# Altium PCB ARM2toARM3Adapter.pcbdoc
Units mm, origin at the board's own origin, x right, y up, seen from the top; angles counter-clockwise.
Board outline 40.84 x 49.23 mm, 4 copper layers (TopLayer, GND, VCC, BottomLayer), stack 1.659 mm thick; 18 components, 80 nets, 290 pads, 148 vias.
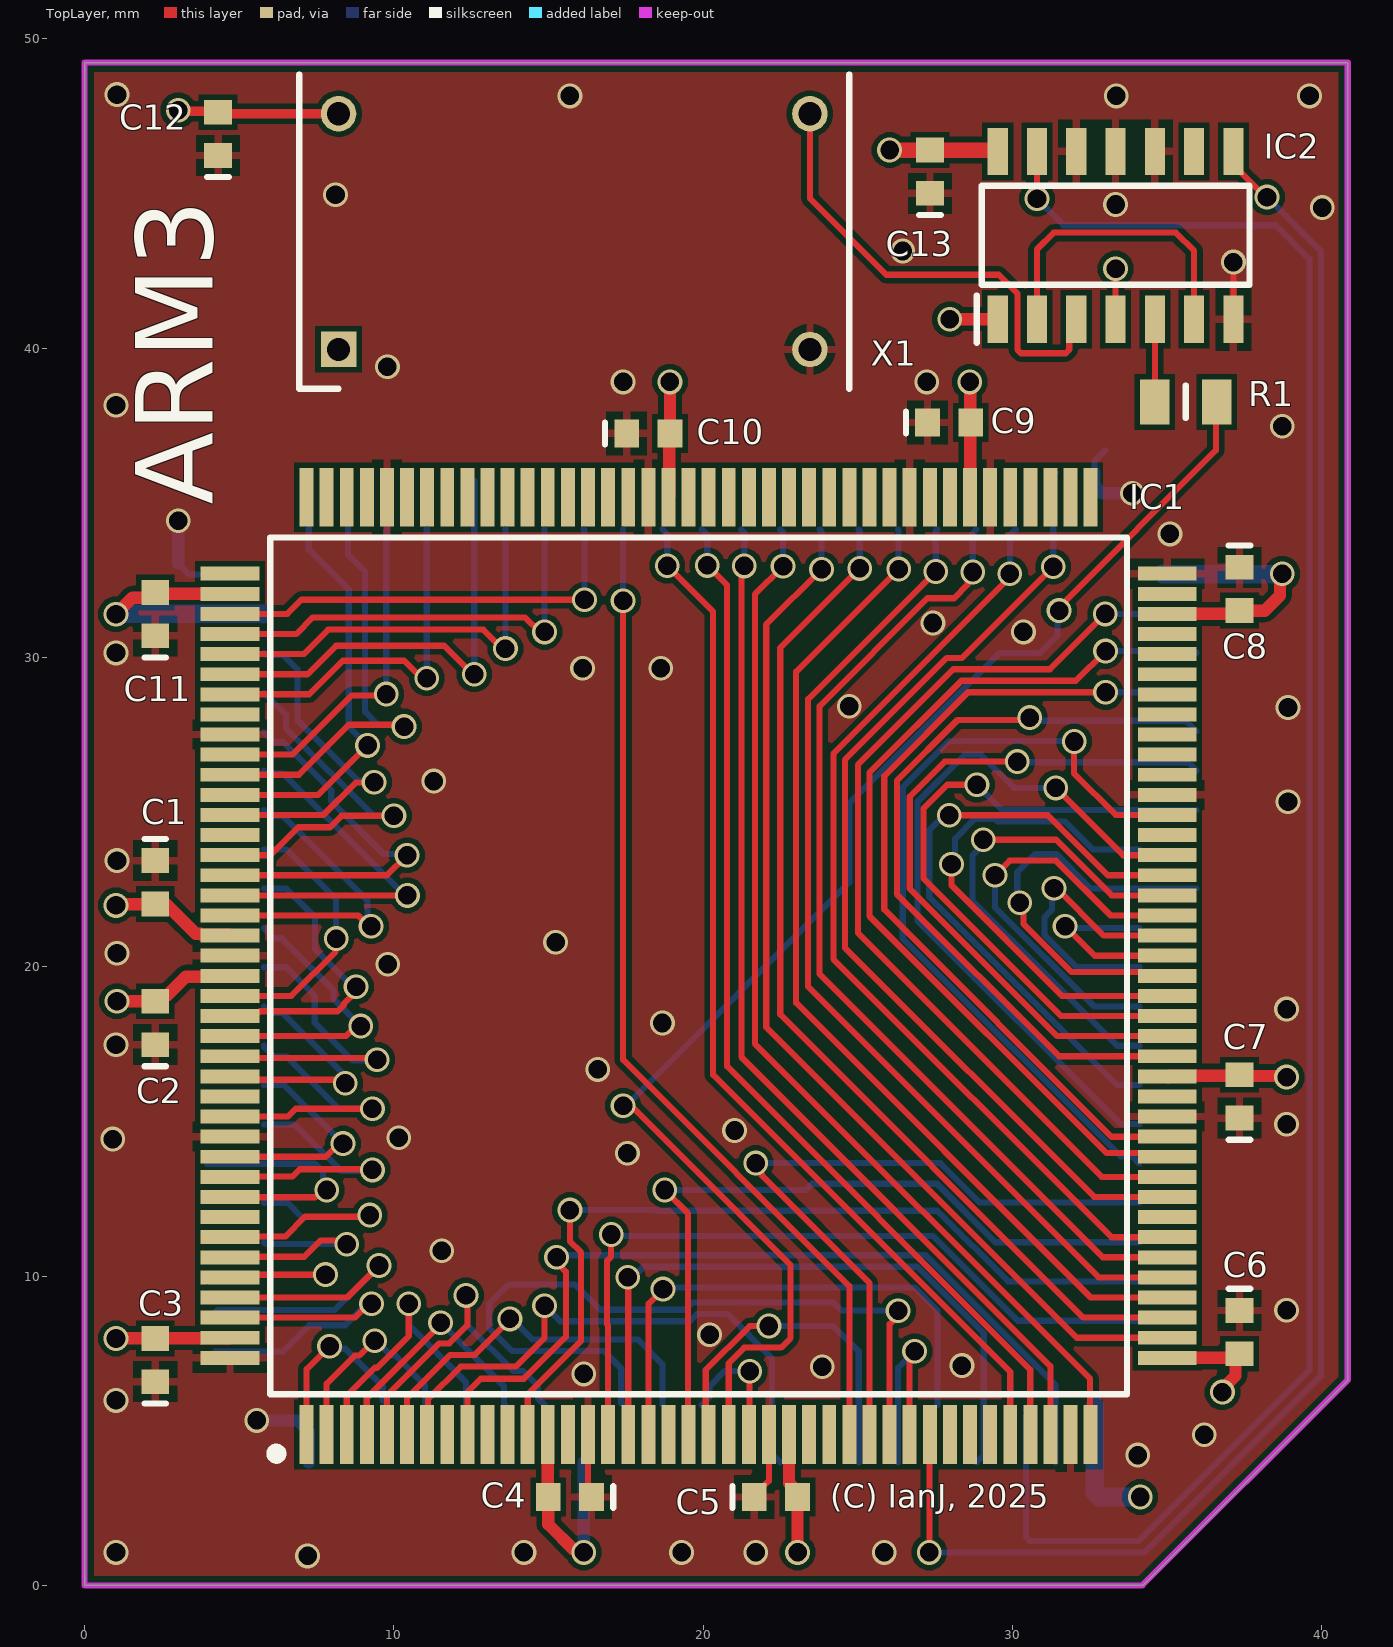
[diagram p0: TopLayer view]
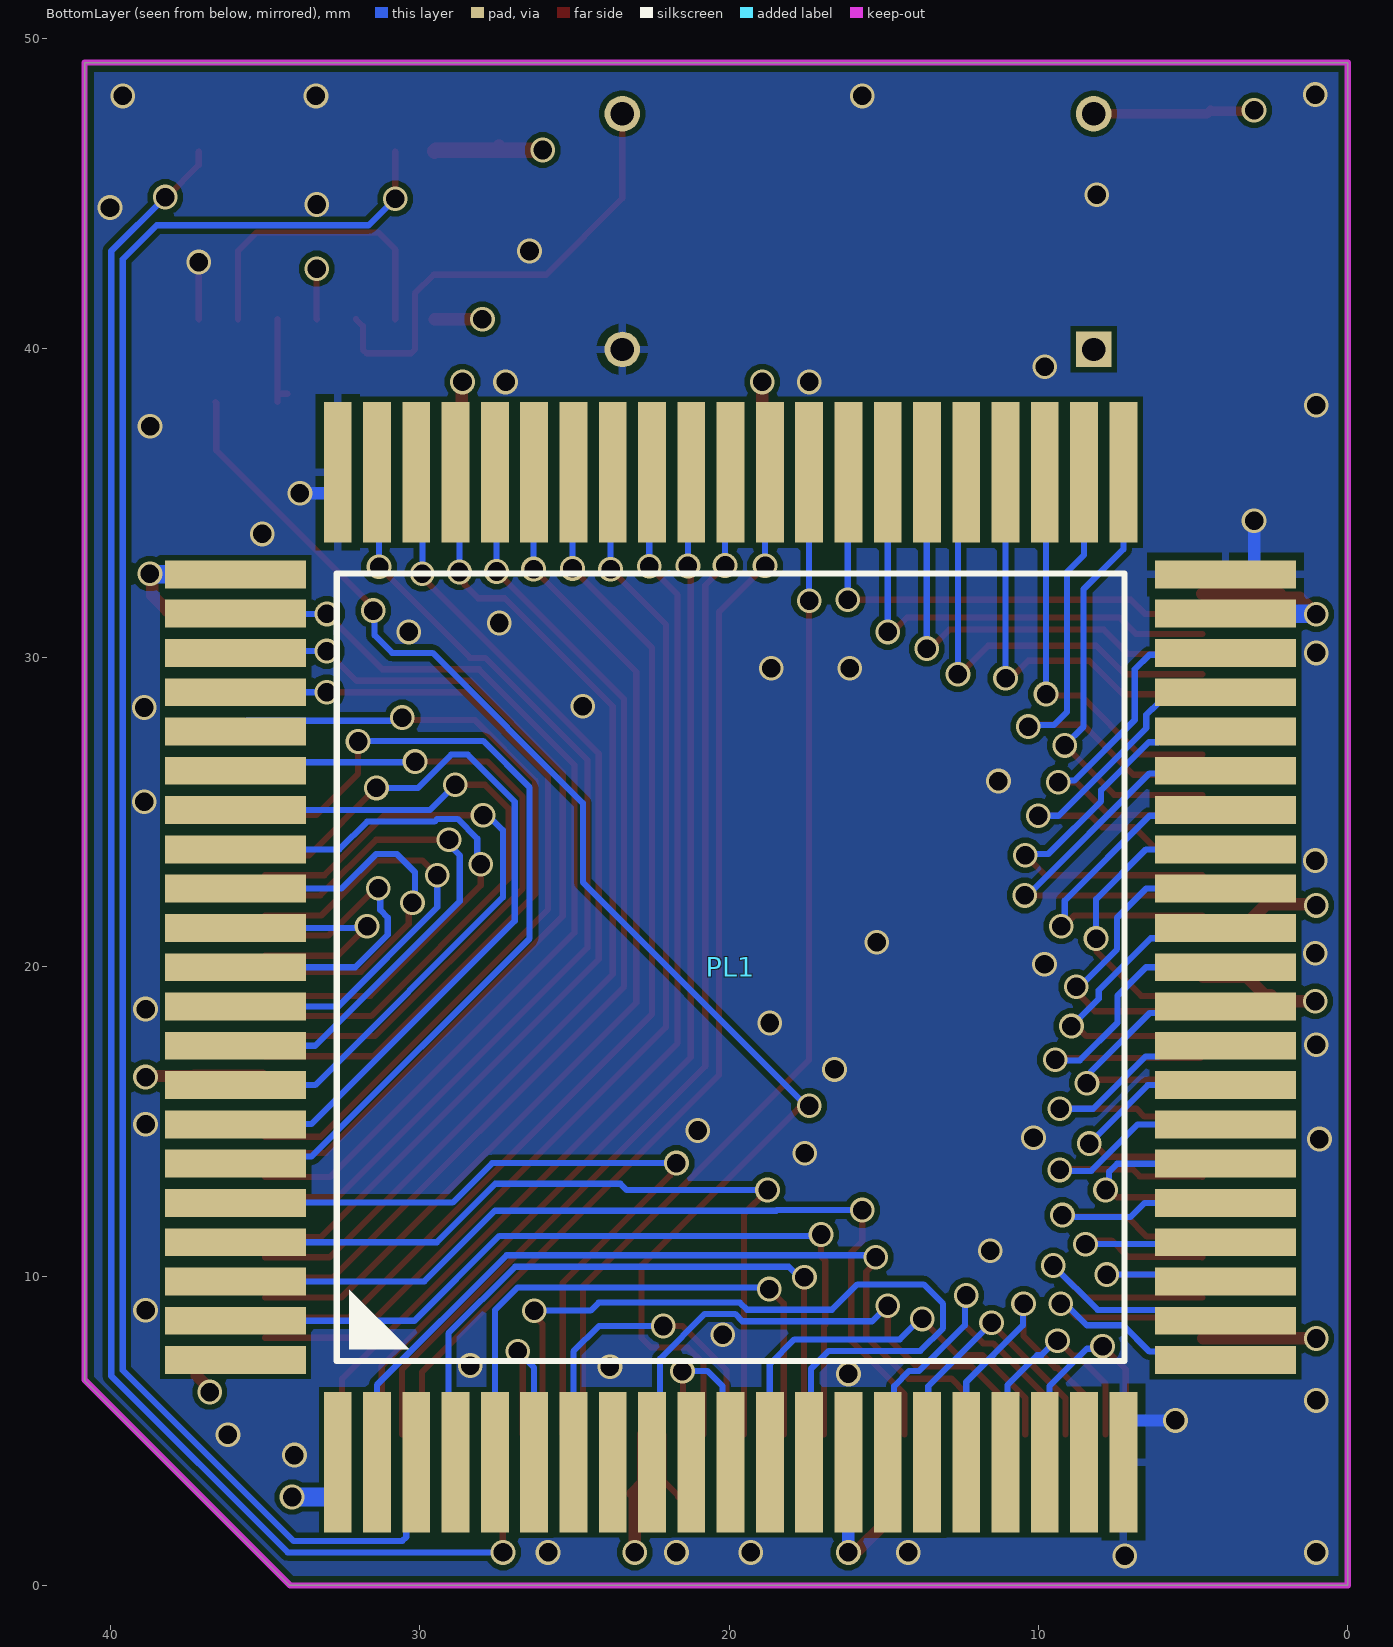
[diagram p1: BottomLayer view, seen from below]
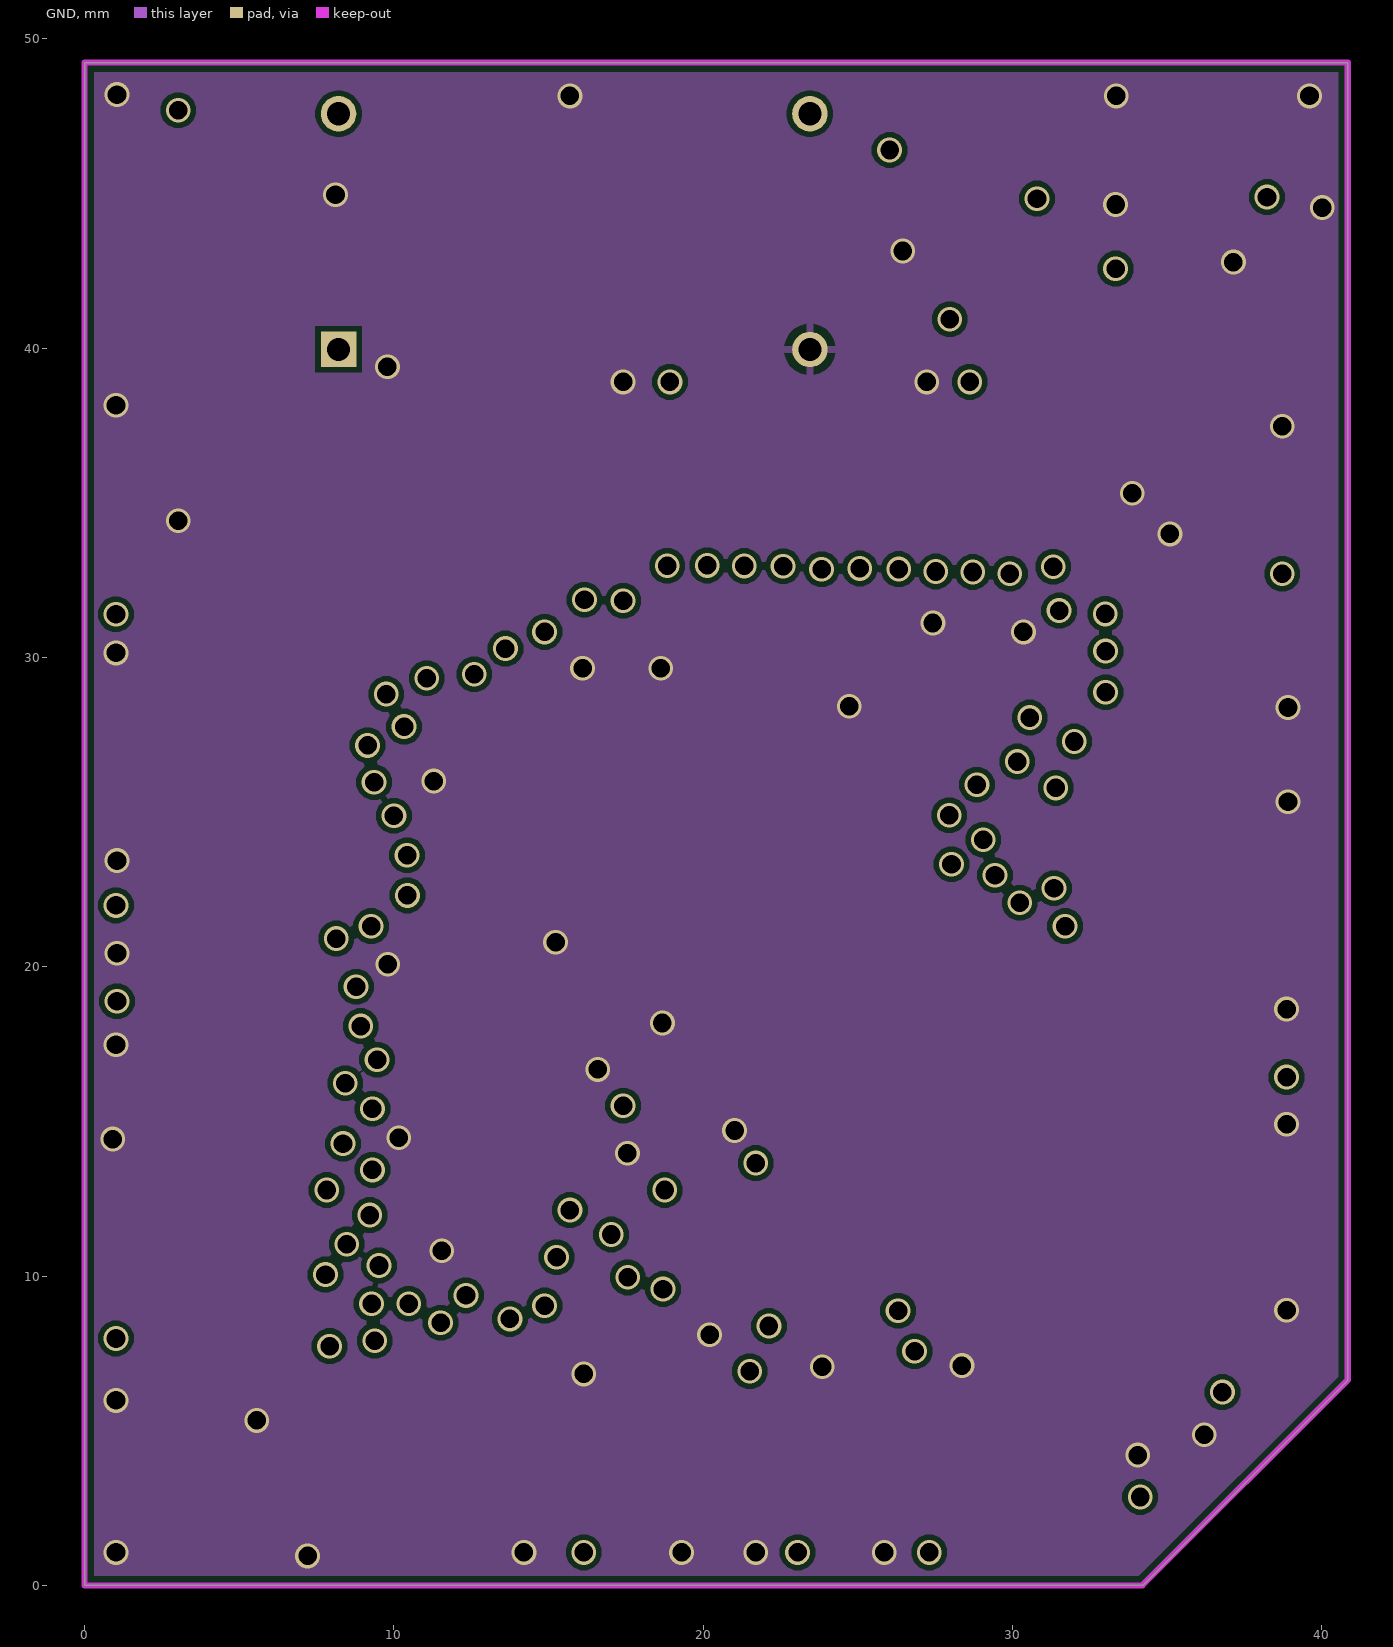
[diagram p2: GND]
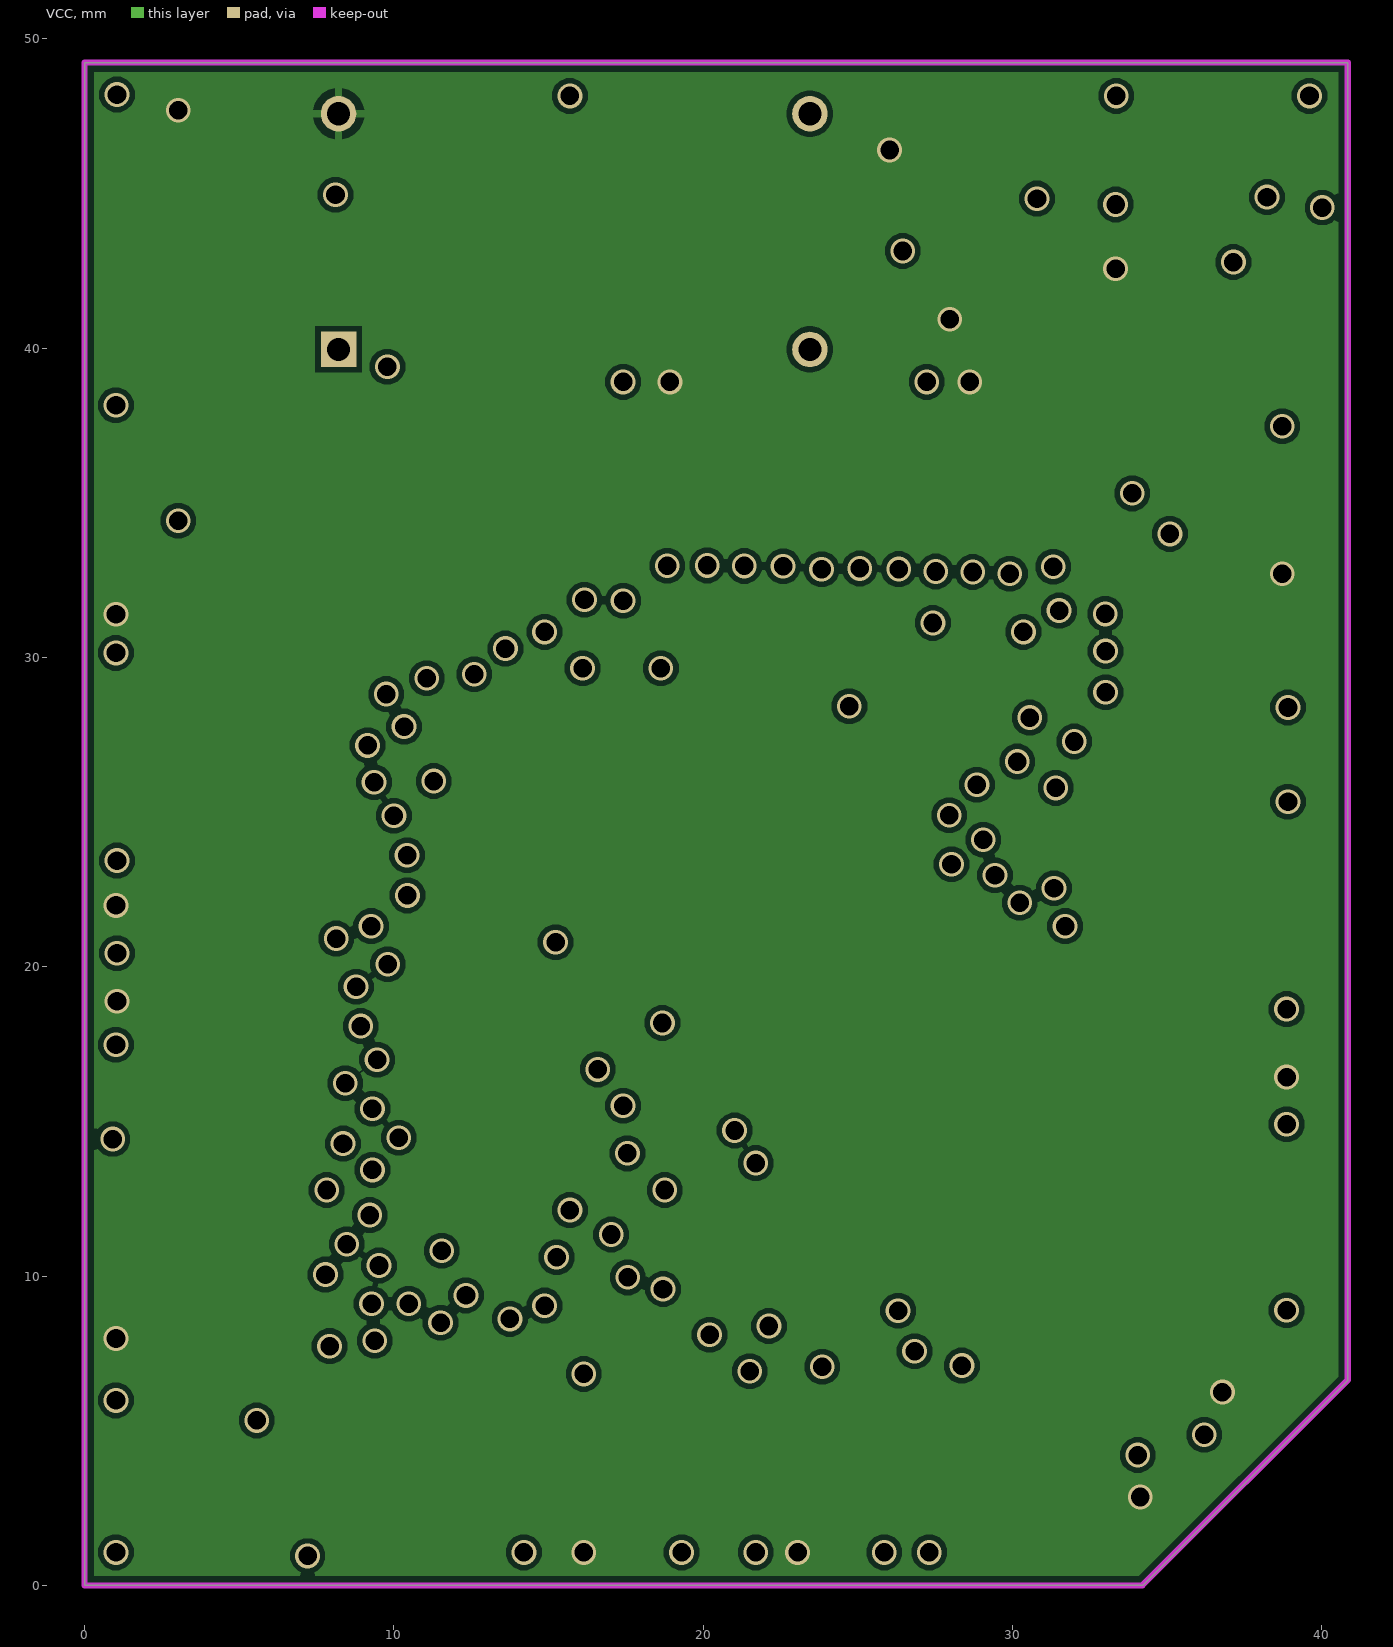
[diagram p3: VCC]

## Layer stack, top to bottom
TopSolder: solder mask 0.01, Solder Resist, Dk 3.5
TopLayer: signal copper 0.036
Dielectric 1: prepreg 0.2083, PP-022, Dk 4.5
GND: signal copper 0.035
Dielectric 2: core 1.1, Core-043, Dk 4.3
VCC: signal copper 0.035
Dielectric 3: prepreg 0.2083, PP-022, Dk 4.5
BottomLayer: signal copper 0.036
BottomSolder: solder mask 0.01, Solder Resist, Dk 3.5

## Board outline
40.836,6.626 34.21,0 0,0 0,49.234 40.836,49.234

## Design rules (kind name [scope] priority, off if disabled: settings)
BoardOutlineClearance [All] p1: gap=0.3 ignorepadtopadclearanceinfootprint=FALSE
Clearance [All] p1: gap=0.17 ignorepadtopadclearanceinfootprint=FALSE except(0.3: Via-Via; 0.5: Via-Hole)
ComponentClearance ComponentClearance_Z2_Z3 [(InComponent('Z2') OR InComponent('Z3')) vs InComponent('No Component')] p1: gap=0 collisioncheckmode=3 verticalgap=0 showdistances=FALSE
ComponentClearance ComponentClearance_U4_J104 [All] p2: gap=0 collisioncheckmode=3 verticalgap=0 showdistances=FALSE
ComponentClearance ComponentClearance_J3_J4 [InComponent('J3') vs InComponent('J4')] p3: gap=0 collisioncheckmode=3 verticalgap=0 showdistances=FALSE
ComponentClearance ComponentClearance_J103_J104 [InComponent('J103') vs InComponent('J104')] p4: gap=0 collisioncheckmode=3 verticalgap=0 showdistances=FALSE
ComponentClearance [All] p5: gap=0.254 collisioncheckmode=3 verticalgap=0.254 showdistances=FALSE
DiffPairsRouting [InDifferentialPairClass('All Differential Pairs')] p1: maxlimit=0.254 minlimit=0.114 mostfreqgap=0.17 toplayer_mingap=0.17 toplayer_minwidth=0.2 toplayer_maxwidth=0.381 toplayer_prefwidth=0.237 midlayer1_prefgap=0.115 midlayer1_minwidth=0.381 midlayer1_maxwidth=0.381 midlayer1_prefwidth=0.381 midlayer2_prefgap=0.115 midlayer2_minwidth=0.381 midlayer2_maxwidth=0.381 midlayer2_prefwidth=0.381 bottomlayer_mingap=0.17 bottomlayer_minwidth=0.2 bottomlayer_maxwidth=0.381 bottomlayer_prefwidth=0.237 maxuncoupledlength=12.7
FabricationTestPointUsage TestPointUsage [All] p1: valid=0 allowmultiple=FALSE
FabricationTestpoint Testpoint [All] p1: side=3 testpointundercomponent=TRUE minsize=1.016 maxsize=2.54 preferedsize=1.524 minholesize=0.508 maxholesize=1.016 preferedholesize=0.813 testpointgrid=0.025 allowsidetop=TRUE allowsidebottom=TRUE usegrid=TRUE gridtolerance=0
HoleSize [All] p1: absolutevalues=TRUE maxlimit=5.5 minlimit=0.2 maxpercent=80.000 minpercent=20.000
HoleToHoleClearance [All] p1: gap=0.25 allowstackedmicrovias=FALSE
MinimumSolderMaskSliver [All] p1: minsoldermaskwidth=0.02
PlaneClearance [All] p1: clearance=0.2
PlaneConnect [All] p1: pad.planeconnectstyle=Relief pad.reliefexpansion=0.508 pad.reliefentries=4 pad.reliefconductorwidth=0.254 pad.reliefairgap=0.254 via.planeconnectstyle=Direct via.reliefexpansion=0.508 via.reliefentries=4 via.reliefconductorwidth=0.254 via.reliefairgap=0.254
PolygonConnect [All] p1: thpad.connectstyle=Relief thpad.reliefconductorwidth=0.254 thpad.reliefentries=4 thpad.polygonreliefangle="90 Angle" thpad.airgapwidth=0.254 smdpad.connectstyle=Relief smdpad.reliefconductorwidth=0.254 smdpad.reliefentries=4 smdpad.polygonreliefangle="90 Angle" smdpad.airgapwidth=0.254 via.connectstyle=Direct via.reliefconductorwidth=0.254 via.reliefentries=4 via.polygonreliefangle="90 Angle" via.airgapwidth=0.254
RoutingVias [All] p1: holewidth=0.2 width=0.4 viastyle="Through Hole" minholewidth=0.2 minwidth=0.4 maxholewidth=0.6 maxwidth=0.8
SilkToSilkClearance [All] p1: silktosilkclearance=0.1
SilkToSolderMaskClearance SilkscreenOverComponentPads [IsPad] p1: minsilkscreentomaskgap=0.1 clearancetoexposedcopper=TRUE
SolderMaskExpansion [All] p1: expansion=0.075 istentingtop=FALSE
SupplyNets "Schematic Supply Nets_1" [InNet('GND')] p1: voltage=0.000
SupplyNets "Schematic Supply Nets" [InNet('VCC')] p2: voltage=0.000
Width [All] p1: maxlimit=5 minlimit=0.15 preferedwidth=0.2
19 further rules are at their usual default settings.

## Classes and differential pairs
net class D[0..31]: D0 D1 D2 D3 D4 D5 D6 D7 D8 D9 D10 D11 D12 D13 D14 D15 D16 D17 D18 D19 D20 D21 D22 D23 D24 D25 D26 D27 D28 D29 D30 D31
net class A[0..25]: A0 A1 A2 A3 A4 A5 A6 A7 A8 A9 A10 A11 A12 A13 A14 A15 A16 A17 A18 A19 A20 A21 A22 A23 A24 A25

## Components (designator, comment, footprint, x,y, rotation, side; value= is the part's Value field where it differs from the comment)
C1 "100n" CAPC1608L 2.286,22.734 r270 top
C2 "100n" CAPC1608L 2.286,18.184 r90 top
C3 "100n" CAPC1608L 2.286,7.287 r90 top
C4 "100n" CAPC1608L 15.691,2.859 r180 top
C5 "100n" CAPC1608L 22.351,2.859 r0 top
C6 "100n" CAPC1608L 37.339,8.189 r270 top
C7 "100n" CAPC1608L 37.339,15.809 r90 top
C8 "100n" CAPC1608L 37.338,32.216 r270 top
C9 "100n" CAPC1608L 27.953,37.596 r0 top
C10 "100n" CAPC1608L 18.226,37.246 r0 top
C11 "100n" CAPC1608L 2.286,31.4 r90 top
C12 "100n" CAPC1608L 4.318,46.93 r90 top
C13 "100n" CAPC1608L 27.332,45.706 r90 top
IC1 "VL86C020" QFP65P3120X3120X407-160N 19.851,20.034 r90 top locked
IC2 "CD74ACT74M" SOIC127P600X175-14N 33.332,43.65 r90 top locked
PL1 "PLCC84 PLUG (ARM2)" PLCC84_PLUG 19.951,19.987 r0 bottom locked
R1 "CRCW080568R0FKEA" RESC2012X50N 35.603,38.264 r0 top value=68R
X1 "50MHz OSC" DIPS762W56P1524L1778H241Q4N 8.211,39.959 r90 top

## Footprints (in the part's own frame and the unit in brackets; to place one, negate y for a bottom-side part, rotate by r counter-clockwise, add the part's x,y. Pads: shape width x height; smd on the part's side, far side on the other; paste and mask are expansions set on the pad)
CAPC1608L [mm] "Chip Capacitor, Body 1.6x0.8mm, IPC High Density"
  rect 0.8x0.9 smd: 1(-0.7,0) 2(0.7,0)
  silkscreen extent -1.4,-0.35 -1.4,0.35, body extent -0.87,-0.48 0.87,0.48, height 0.85
DIPS762W56P1524L1778H241Q4N [mm]
  rect 1.15x1.15 hole 0.75: 1(0,0)
  round 1.15 hole 0.75: 2(0,-15.24) 3(7.62,-15.24) 4(7.62,0)
  silkscreen extent -1.27,-16.51 8.89,1.27
PLCC84_PLUG [mm] "PLCC84 plug (reversed pin map)"
  rect 0.9x4.55 smd: 1(0,16.002) 2(1.27,16.002) 3(2.54,16.002) 4(3.81,16.002) 5(5.08,16.002) 6(6.35,16.002) 7(7.62,16.002) 8(8.89,16.002) 9(10.16,16.002) 10(11.43,16.002) 11(12.7,16.002) 33(12.7,-16.002) 34(11.43,-16.002) 35(10.16,-16.002) 36(8.89,-16.002) 37(7.62,-16.002) 38(6.35,-16.002) 39(5.08,-16.002) 40(3.81,-16.002) 41(2.54,-16.002) 42(1.27,-16.002) 43(0,-16.002) 44(-1.27,-16.002) 45(-2.54,-16.002) 46(-3.81,-16.002) 47(-5.08,-16.002) 48(-6.35,-16.002) 49(-7.62,-16.002) 50(-8.89,-16.002) 51(-10.16,-16.002) 52(-11.43,-16.002) 53(-12.7,-16.002) 75(-12.7,16.002) 76(-11.43,16.002) 77(-10.16,16.002) 78(-8.89,16.002) 79(-7.62,16.002) 80(-6.35,16.002) 81(-5.08,16.002) 82(-3.81,16.002) 83(-2.54,16.002) 84(-1.27,16.002)
  rect 4.55x0.9 smd: 12(16.002,12.7) 13(16.002,11.43) 14(16.002,10.16) 15(16.002,8.89) 16(16.002,7.62) 17(16.002,6.35) 18(16.002,5.08) 19(16.002,3.81) 20(16.002,2.54) 21(16.002,1.27) 22(16.002,0) 23(16.002,-1.27) 24(16.002,-2.54) 25(16.002,-3.81) 26(16.002,-5.08) 27(16.002,-6.35) 28(16.002,-7.62) 29(16.002,-8.89) 30(16.002,-10.16) 31(16.002,-11.43) 32(16.002,-12.7) 54(-16.002,-12.7) 55(-16.002,-11.43) 56(-16.002,-10.16) 57(-16.002,-8.89) 58(-16.002,-7.62) 59(-16.002,-6.35) 60(-16.002,-5.08) 61(-16.002,-3.81) 62(-16.002,-2.54) 63(-16.002,-1.27) 64(-16.002,0) 65(-16.002,1.27) 66(-16.002,2.54) 67(-16.002,3.81) 68(-16.002,5.08) 69(-16.002,6.35) 70(-16.002,7.62) 71(-16.002,8.89) 72(-16.002,10.16) 73(-16.002,11.43) 74(-16.002,12.7)
  silkscreen extent -12.73,-12.73 12.73,12.73
QFP65P3120X3120X407-160N [mm]
  rect 1.9x0.45 smd: 1(-15.15,12.675) 2(-15.15,12.025) 3(-15.15,11.375) 4(-15.15,10.725) 5(-15.15,10.075) 6(-15.15,9.425) 7(-15.15,8.775) 8(-15.15,8.125) 9(-15.15,7.475) 10(-15.15,6.825) 11(-15.15,6.175) 12(-15.15,5.525) 13(-15.15,4.875) 14(-15.15,4.225) 15(-15.15,3.575) 16(-15.15,2.925) 17(-15.15,2.275) 18(-15.15,1.625) 19(-15.15,0.975) 20(-15.15,0.325) 21(-15.15,-0.325) 22(-15.15,-0.975) 23(-15.15,-1.625) 24(-15.15,-2.275) 25(-15.15,-2.925) 26(-15.15,-3.575) 27(-15.15,-4.225) 28(-15.15,-4.875) 29(-15.15,-5.525) 30(-15.15,-6.175) 31(-15.15,-6.825) 32(-15.15,-7.475) 33(-15.15,-8.125) 34(-15.15,-8.775) 35(-15.15,-9.425) 36(-15.15,-10.075) 37(-15.15,-10.725) 38(-15.15,-11.375) 39(-15.15,-12.025) 40(-15.15,-12.675) 81(15.15,-12.675) 82(15.15,-12.025) 83(15.15,-11.375) 84(15.15,-10.725) 85(15.15,-10.075) 86(15.15,-9.425) 87(15.15,-8.775) 88(15.15,-8.125) 89(15.15,-7.475) 90(15.15,-6.825) 91(15.15,-6.175) 92(15.15,-5.525) 93(15.15,-4.875) 94(15.15,-4.225) 95(15.15,-3.575) 96(15.15,-2.925) 97(15.15,-2.275) 98(15.15,-1.625) 99(15.15,-0.975) 100(15.15,-0.325) 101(15.15,0.325) 102(15.15,0.975) 103(15.15,1.625) 104(15.15,2.275) 105(15.15,2.925) 106(15.15,3.575) 107(15.15,4.225) 108(15.15,4.875) 109(15.15,5.525) 110(15.15,6.175) 111(15.15,6.825) 112(15.15,7.475) 113(15.15,8.125) 114(15.15,8.775) 115(15.15,9.425) 116(15.15,10.075) 117(15.15,10.725) 118(15.15,11.375) 119(15.15,12.025) 120(15.15,12.675)
  rect 0.45x1.9 smd: 41(-12.675,-15.15) 42(-12.025,-15.15) 43(-11.375,-15.15) 44(-10.725,-15.15) 45(-10.075,-15.15) 46(-9.425,-15.15) 47(-8.775,-15.15) 48(-8.125,-15.15) 49(-7.475,-15.15) 50(-6.825,-15.15) 51(-6.175,-15.15) 52(-5.525,-15.15) 53(-4.875,-15.15) 54(-4.225,-15.15) 55(-3.575,-15.15) 56(-2.925,-15.15) 57(-2.275,-15.15) 58(-1.625,-15.15) 59(-0.975,-15.15) 60(-0.325,-15.15) 61(0.325,-15.15) 62(0.975,-15.15) 63(1.625,-15.15) 64(2.275,-15.15) 65(2.925,-15.15) 66(3.575,-15.15) 67(4.225,-15.15) 68(4.875,-15.15) 69(5.525,-15.15) 70(6.175,-15.15) 71(6.825,-15.15) 72(7.475,-15.15) 73(8.125,-15.15) 74(8.775,-15.15) 75(9.425,-15.15) 76(10.075,-15.15) 77(10.725,-15.15) 78(11.375,-15.15) 79(12.025,-15.15) 80(12.675,-15.15) 121(12.675,15.15) 122(12.025,15.15) 123(11.375,15.15) 124(10.725,15.15) 125(10.075,15.15) 126(9.425,15.15) 127(8.775,15.15) 128(8.125,15.15) 129(7.475,15.15) 130(6.825,15.15) 131(6.175,15.15) 132(5.525,15.15) 133(4.875,15.15) 134(4.225,15.15) 135(3.575,15.15) 136(2.925,15.15) 137(2.275,15.15) 138(1.625,15.15) 139(0.975,15.15) 140(0.325,15.15) 141(-0.325,15.15) 142(-0.975,15.15) 143(-1.625,15.15) 144(-2.275,15.15) 145(-2.925,15.15) 146(-3.575,15.15) 147(-4.225,15.15) 148(-4.875,15.15) 149(-5.525,15.15) 150(-6.175,15.15) 151(-6.825,15.15) 152(-7.475,15.15) 153(-8.125,15.15) 154(-8.775,15.15) 155(-9.425,15.15) 156(-10.075,15.15) 157(-10.725,15.15) 158(-11.375,15.15) 159(-12.025,15.15) 160(-12.675,15.15)
  silkscreen extent -15.94,-13.85 13.85,13.85, body extent -15.6,-15.6 15.6,15.6, height 4.07
RESC2012X50N [mm]
  rect 0.95x1.45 smd: 1(-1,0) 2(1,0)
  silkscreen extent 0,-0.53 0,0.53, body extent -1.02,-0.63 1.02,0.63, height 0.5
SOIC127P600X175-14N [mm]
  rect 1.525x0.65 smd: 1(-2.712,3.81) 2(-2.712,2.54) 3(-2.712,1.27) 4(-2.712,0) 5(-2.712,-1.27) 6(-2.712,-2.54) 7(-2.712,-3.81) 8(2.712,-3.81) 9(2.712,-2.54) 10(2.712,-1.27) 11(2.712,0) 12(2.712,1.27) 13(2.712,2.54) 14(2.712,3.81)
  silkscreen extent -3.47,-4.33 1.6,4.48, body extent -3,-4.33 3,4.33, height 1.75

## Part data
C1 C2 C3 C4 C5 C6 C7 C8 C9 C10 C11 C12 C13: library part CAP_100n_0603_50V_0, "CAP 100nF, 0603, 50V, X7R, 10%", Distributor1 Part No=CL10B104KB8NNNC, Distributor2 Part No=311-1344-2-ND, Manufacturer1=Samsung, Manufacturer2=Yageo, Voltage=50V, ComponentLink1Description=ComponentLinknURL1, ComponentLink1URL=https://media.digikey.com/pdf/Data%20Sheets/Samsung%20PDFs/CL_Series_MLCC_ds.pdf, ComponentLink2Description=ComponentLinknURL2, ComponentLink2URL=https://www.yageo.com/upload/media/product/productsearch/datasheet/mlcc/UPY-GPHC_X7R_6.3V-to-50V_18.pdf, Distributor1=Anglia, Distributor2=Digikey, ManuPart1=CL10B104KB8NNNC, ManuPart2=CC0603KRX7R9BB104
IC1: library part SAA7146AH_V4,557, "ARM3", Manufacturer_Name=VLSI, Manufacturer_Part_Number=VL86C)20, Height=4.07mm
IC2: "Integrated Circuit", Manufacturer_Name="Texas Instruments", Mouser Part Number=595-CD74ACT74M, Datasheet Link=http://www.ti.com/lit/ds/symlink/cd74act74.pdf, Height=1.75mm, Manufacturer_Part_Number=CD74ACT74M, Mouser Price/Stock=https://www.mouser.com/Search/Refine.aspx?Keyword=595-CD74ACT74M
PL1: library part PLCC84_PLUG_ARM2, "PLCC84 Plug", Manufacturer_Name=Winslow, Manufacturer_Part_Number=W9328, Height=15mm
R1: "68R Resistor", Manufacturer_Name=Vishay, Mouser Part Number=71-CRCW080568R0FKEA, Arrow Part Number=CRCW080568R0FKEA, Arrow Price/Stock=https://www.arrow.com/en/products/crcw080568r0fkea/vishay, Datasheet Link=http://www.vishay.com/docs/20035/dcrcwe3.pdf, Height=0.5mm, Manufacturer_Part_Number=CRCW080568R0FKEA, Mouser Price/Stock=https://www.mouser.com/Search/Refine.aspx?Keyword=71-CRCW080568R0FKEA
X1: library part 1107741, Manufacturer_Name=ARIES, Mouser Part Number=535-1107741, Datasheet Link=http://docs-emea.rs-online.com/webdocs/13f3/0900766b813f3237.pdf, Height=2.41mm, Manufacturer_Part_Number=1107741, Mouser Price/Stock=https://www.mouser.co.uk/ProductDetail/Aries-Electronics/1107741?qs=WZRMhwwaLl%2FApwqojhfzdA%3D%3D

## Via types
v1: diameter 0.8, hole 0.6, TopLayer to BottomLayer, tented both sides, 148 vias

## Nets (pads, with @x,y where several pads share a name; then routed paths per layer and width w, separated by ;. In a path a pad name is that pad's centre, name@x,y a point inside that pad or via, vN(x,y) a via of type N, cw(c..) or ccw(c..) an arc to the next point about the centre after c; other vN are vias at no path point)
/ARST: IC1.32 IC2.8 | length 59.6
  TopLayer w0.2: v1(27.307,1.069) 27.317,1.078 27.317,4.875 IC1.32 ; IC2.8 37.142,45.924 38.181,44.885 v1(38.228,44.885)
  BottomLayer w0.2: v1(27.307,1.069) 34.269,1.069 39.971,6.771 39.971,43.142 v1(38.228,44.885)
/B/W: IC1.6 PL1.84 | length 12.4
  TopLayer w0.2: IC1.6 10.426,6.062 11.816,7.452 12.616,7.452 13.751,8.587 v1(13.751,8.617)
  BottomLayer w0.2: v1(13.751,8.617) 13.818,8.617 14.481,7.954 17.884,7.954 18.681,7.157 PL1.84@18.681,5.834
/FIQ: IC1.17 PL1.8 | length 21.9
  TopLayer w0.2: v1(17.562,9.96) 17.576,9.946 IC1.17
  BottomLayer w0.2: v1(17.562,9.96) 17.725,9.96 18.07,10.305 26.915,10.305 29.072,8.149 29.072,4.215 PL1.8
/IRQ: IC1.18 PL1.7 | length 17.2
  TopLayer w0.2: IC1.18 18.233,4.891 18.233,9.114 v1(18.702,9.583)
  BottomLayer w0.2: v1(18.702,9.583) 18.754,9.635 26.832,9.635 27.571,8.896 PL1.7@27.571,5.834
/MEMRQ: IC1.21 PL1.5 | length 11.6
  TopLayer w0.2: IC1.21 20.083,4.977 20.083,6.966 21.503,8.387 v1(22.126,8.387)
  BottomLayer w0.2: v1(22.126,8.387) 24.208,8.387 25.031,7.564 PL1.5
/R/W: IC1.7 PL1.3 | length 18.5
  TopLayer w0.2: IC1.7 11.102,4.91 11.102,6.017 12.16,7.074 13.933,7.074 14.871,8.012 v1(14.871,9.046)
  BottomLayer w0.2: v1(14.871,9.046) 15.375,8.543 19.571,8.543 19.805,8.777 20.786,8.777 22.227,7.336 22.227,4.249 PL1.3
A0: IC1.36 PL1.44 | length 33.9
  TopLayer w0.2: v1(18.836,32.968) 20.32,31.484 20.32,16.508 29.926,6.902 IC1.36
  BottomLayer w0.2: PL1.44@18.681,34.14 18.836,33.985 v1(18.836,32.968)
A1: IC1.37 PL1.43 | length 33.7
  TopLayer w0.2: v1(20.129,32.976) 20.771,32.334 20.771,16.782 30.576,6.977 IC1.37
  BottomLayer w0.2: PL1.43@19.951,34.14 20.129,33.962 v1(20.129,32.976)
A2: IC1.38 PL1.42 | length 33.5
  TopLayer w0.2: v1(21.329,32.959) 21.238,32.869 21.238,17.079 31.226,7.092 IC1.38
  BottomLayer w0.2: PL1.42@21.221,34.14 21.329,34.032 v1(21.329,32.959)
A3: IC1.40 PL1.41 | length 34.2
  TopLayer w0.2: v1(22.581,32.951) 21.671,32.041 21.671,17.519 32.508,6.682 32.508,4.902 IC1.40
  BottomLayer w0.2: PL1.41@22.491,34.14 22.581,34.049 v1(22.581,32.951)
A4: IC1.42 PL1.40 | length 34
  TopLayer w0.2: v1(23.829,32.855) 22.041,31.067 22.041,18.21 22.041,18.044 32.076,8.009 IC1.42
  BottomLayer w0.2: PL1.40@23.761,34.14 23.829,34.072 v1(23.829,32.855)
A5: IC1.43 PL1.39 | length 33.3
  TopLayer w0.2: v1(25.061,32.878) 22.491,30.308 22.491,18.462 32.294,8.659 IC1.43
  BottomLayer w0.2: PL1.39@25.031,34.14 25.061,34.109 v1(25.061,32.878)
A6: IC1.44 PL1.38 | length 32.6
  TopLayer w0.2: v1(26.319,32.857) 23.001,29.54 23.001,18.838 32.53,9.309 IC1.44
  BottomLayer w0.2: PL1.38@26.301,34.14 26.319,34.122 v1(26.319,32.857)
A7: IC1.45 PL1.37 | length 32
  TopLayer w0.2: v1(27.516,32.779) 23.391,28.654 23.391,19.359 32.791,9.959 IC1.45
  BottomLayer w0.2: v1(27.516,32.779) 27.516,34.085 PL1.37@27.571,34.14
A8: IC1.46 PL1.36 | length 32
  TopLayer w0.2: v1(28.716,32.764) 28.716,32.601 28.543,32.428 28.543,32.346 28.113,31.916 27.251,31.916 23.761,28.426 23.761,19.763 32.915,10.609 IC1.46
  BottomLayer w0.2: v1(28.716,32.764) 28.716,34.015 PL1.36@28.841,34.14
A9: IC1.47 PL1.35 | length 30.8
  TopLayer w0.2: v1(29.915,32.709) 29.915,32.596 24.211,26.892 24.211,20.252 33.204,11.259 IC1.47
  BottomLayer w0.2: v1(29.915,32.709) 29.915,33.944 PL1.35@30.111,34.14
A10: IC1.49 PL1.34 | length 32.2
  TopLayer w0.2: v1(31.316,32.934) 28.369,29.987 27.881,29.987 24.581,26.687 24.581,20.615 32.637,12.559 IC1.49
  BottomLayer w0.2: v1(31.316,32.934) 31.316,35.923 PL1.34
A11: IC1.50 PL1.31 | length 29.8
  TopLayer w0.2: v1(33.001,31.409) 31.209,29.617 28.089,29.617 25.001,26.529 25.001,21.094 32.887,13.209 IC1.50
  BottomLayer w0.2: v1(33.001,31.409) 34.096,31.409 PL1.31@34.104,31.417
A12: IC1.51 PL1.30 | length 29.7
  TopLayer w0.2: v1(33.007,30.209) 32.045,29.247 28.351,29.247 25.376,26.272 25.376,21.643 33.035,13.984 34.876,13.984 IC1.51
  BottomLayer w0.2: v1(33.007,30.209) 35.891,30.209 PL1.30
A13: IC1.52 PL1.29 | length 25.9
  TopLayer w0.2: v1(33.007,28.877) 28.561,28.877 25.851,26.166 25.851,21.856 33.198,14.509 IC1.52
  BottomLayer w0.2: v1(33.007,28.877) PL1.29@34.104,28.877
A14: IC1.56 PL1.28 | length 25.3
  TopLayer w0.2: v1(30.561,28.057) 30.483,27.979 28.221,27.979 26.263,26.021 26.263,22.352 31.506,17.109 IC1.56
  BottomLayer w0.2: v1(30.561,28.057) 30.661,27.957 35.603,27.957 PL1.28
A15: IC1.57 PL1.27 | length 23.1
  TopLayer w0.2: v1(30.151,26.634) 27.808,26.634 26.676,25.502 26.676,22.53 31.447,17.759 IC1.57
  BottomLayer w0.2: v1(30.151,26.634) 30.171,26.614 35.676,26.614 PL1.27
A16: IC1.58 PL1.26 | length 21.5
  TopLayer w0.2: v1(28.851,25.887) 27.891,25.887 27.121,25.117 27.121,22.858 31.57,18.409 IC1.58
  BottomLayer w0.2: v1(28.851,25.887) 29.671,25.067 PL1.26
A17: IC1.59 PL1.25 | length 16.6
  TopLayer w0.2: v1(28.028,23.319) 28.028,22.631 31.599,19.059 IC1.59
  BottomLayer w0.2: v1(28.028,23.319) 28.142,23.434 28.142,24.145 28.776,24.779 29.435,24.779 29.518,24.697 31.7,24.697 32.6,23.797 PL1.25@34.104,23.797
A18: IC1.60 PL1.24 | length 13.6
  TopLayer w0.2: v1(30.237,22.068) 30.352,21.953 30.352,21.386 31.904,19.834 34.876,19.834 IC1.60
  BottomLayer w0.2: v1(30.237,22.068) 30.153,22.153 30.153,23.059 30.74,23.647 31.413,23.647 32.533,22.527 PL1.24
A19: IC1.61 PL1.23 | length 6.1
  TopLayer w0.2: v1(31.701,21.315) 32.657,20.359 IC1.61
  BottomLayer w0.2: v1(31.701,21.315) 31.759,21.257 PL1.23@34.104,21.257
A20: IC1.62 PL1.22 | length 9.4
  TopLayer w0.2: v1(31.341,22.538) 31.426,22.538 32.955,21.009 IC1.62
  BottomLayer w0.2: v1(31.341,22.538) 31.276,22.473 31.276,21.838 31.031,21.593 31.031,21.038 32.082,19.987 PL1.22@34.104,19.987
A21: IC1.63 PL1.21 | length 13.5
  TopLayer w0.2: v1(29.434,22.959) 29.909,23.434 31.401,23.434 33.176,21.659 IC1.63
  BottomLayer w0.2: v1(29.434,22.959) 29.434,21.924 32.641,18.717 PL1.21@34.104,18.717
A22: IC1.64 PL1.20 | length 16.2
  TopLayer w0.2: v1(29.054,24.109) 31.41,24.109 33.21,22.309 IC1.64
  BottomLayer w0.2: v1(29.054,24.109) 29.054,23.947 28.708,23.602 28.708,22.12 33.382,17.447 PL1.20@34.104,17.447
A23: IC1.65 PL1.19 | length 20.2
  TopLayer w0.2: v1(27.952,24.902) 31.14,24.902 33.084,22.959 IC1.65
  BottomLayer w0.2: v1(27.952,24.902) 27.8,24.902 27.31,24.412 27.31,22.249 33.382,16.177 PL1.19@34.104,16.177
A24: IC1.66 PL1.18 | length 23.8
  TopLayer w0.2: v1(31.401,25.784) 33.576,23.609 IC1.66
  BottomLayer w0.2: v1(31.401,25.784) 30.053,25.784 28.978,26.859 28.449,26.859 26.928,25.339 26.928,21.485 33.495,14.919 34.092,14.919 PL1.18@34.104,14.907
A25: IC1.68 PL1.17 | length 26.3
  TopLayer w0.2: v1(31.993,27.284) 31.993,26.249 33.332,24.909 IC1.68
  BottomLayer w0.2: v1(31.993,27.284) 31.973,27.304 27.953,27.304 26.451,25.801 26.451,20.912 33.495,13.868 33.873,13.868 PL1.17@34.104,13.637
ABE: IC1.28 PL1.45 | length 32.3
  TopLayer w0.2: v1(17.411,31.834) 17.411,16.988 24.726,9.673 IC1.28
  BottomLayer w0.2: v1(17.411,31.834) PL1.45@17.411,34.14
ABORT: IC1.31 PL1.6 | length 6.6
  TopLayer w0.2: IC1.31 26.669,4.891 26.669,7.356 26.833,7.52 v1(26.833,7.574)
  BottomLayer w0.2: PL1.6 26.301,7.042 v1(26.833,7.574)
ALE: IC1.29 PL1.16 | length 23.2
  TopLayer w0.2: v1(21.701,13.654) 21.701,13.492 21.896,13.296 21.896,13.259 25.376,9.779 IC1.29
  BottomLayer w0.2: v1(21.701,13.654) 27.661,13.654 28.936,12.379 34.092,12.379 PL1.16@34.104,12.367
ARM3CLK: IC1.22 R1.2 | length 46.1
  TopLayer w0.2: v1(17.411,15.509) 17.526,15.394 17.786,15.394 22.826,10.354 22.826,7.997 22.519,7.691 21.33,7.691 20.826,7.186 IC1.22 ; v1(31.506,31.516) 31.506,31.626 36.576,36.696 36.576,38.237 R1.2
  BottomLayer w0.2: v1(17.411,15.509) 17.507,15.509 24.726,22.728 24.726,25.289 29.584,30.147 30.89,30.147 31.459,30.716 31.459,31.469 v1(31.506,31.516)
D0: IC1.123 PL1.46 | length 13.9
  TopLayer w0.2: IC1.123 6.552,31.409 7.01,31.867 v1(16.162,31.867)
  BottomLayer w0.2: PL1.46@16.141,34.14 16.162,34.118 v1(16.162,31.867)
D1: IC1.124 PL1.47 | length 13.9
  TopLayer w0.2: IC1.124 6.84,30.759 7.378,31.297 14.239,31.297 14.709,30.827 v1(14.871,30.827)
  BottomLayer w0.2: v1(14.871,30.827) PL1.47@14.871,34.14
D2: IC1.125 PL1.48 | length 13.3
  TopLayer w0.2: IC1.125 7.088,30.109 7.88,30.901 12.887,30.901 13.498,30.289 v1(13.607,30.289)
  BottomLayer w0.2: PL1.48@13.601,34.14 13.607,34.133 v1(13.607,30.289)
D3: IC1.126 PL1.49 | length 15.3
  TopLayer w0.2: IC1.126 7.211,29.459 8.131,30.379 11.624,30.379 12.544,29.459 v1(12.601,29.459)
  BottomLayer w0.2: PL1.49 12.601,35.719 v1(12.601,29.459)
D4: IC1.127 PL1.50 | length 11.9
  TopLayer w0.2: IC1.127 7.266,28.809 8.354,29.897 10.329,29.897 10.899,29.327 v1(11.061,29.327)
  BottomLayer w0.2: v1(11.061,29.327) PL1.50@11.061,34.14
D5: IC1.130 PL1.51 | length 11.2
  TopLayer w0.2: IC1.130 6.721,26.859 8.636,28.773 9.707,28.773 v1(9.752,28.817)
  BottomLayer w0.2: v1(9.752,28.817) 9.752,34.101 PL1.51@9.791,34.14
D6: IC1.131 PL1.52 | length 15.8
  TopLayer w0.2: IC1.131 6.928,26.209 8.546,27.827 10.267,27.827 v1(10.329,27.765)
  BottomLayer w0.2: PL1.52 8.521,33.314 9.071,32.764 9.071,28.246 9.501,27.816 10.277,27.816 v1(10.329,27.765)
D7: IC1.132 PL1.53 | length 14.7
  TopLayer w0.2: IC1.132 7.551,25.559 v1(9.149,27.157)
  BottomLayer w0.2: PL1.53 7.251,33.495 8.541,32.205 8.541,27.765 v1(9.149,27.157)
D8: IC1.133 PL1.56 | length 11.3
  TopLayer w0.2: IC1.133 7.725,24.909 8.777,25.961 9.355,25.961 v1(9.36,25.965)
  BottomLayer w0.2: PL1.56@5.798,30.147 5.854,30.091 6.407,30.091 6.881,29.617 6.881,27.979 8.841,26.019 9.306,26.019 v1(9.36,25.965)
D9: IC1.135 PL1.57 | length 11.9
  TopLayer w0.2: IC1.135 6.001,23.609 6.906,24.514 7.937,24.514 8.308,24.885 v1(10.001,24.885)
  BottomLayer w0.2: PL1.57@5.798,28.853 6.324,28.327 6.336,28.327 6.511,28.152 6.511,27.718 9.344,24.885 v1(10.001,24.885)
D10: IC1.136 PL1.58 | length 12.5
  TopLayer w0.2: IC1.136 9.776,22.959 v1(10.426,23.609)
  BottomLayer w0.2: PL1.58@5.798,27.583 6.124,27.257 6.426,27.257 7.973,25.71 7.973,25.351 9.676,23.647 10.388,23.647 v1(10.426,23.609)
D11: IC1.137 PL1.59 | length 12
  TopLayer w0.2: IC1.137 v1(10.439,22.309)
  BottomLayer w0.2: PL1.59@5.798,26.337 5.885,26.25 6.407,26.25 10.348,22.309 v1(10.439,22.309)
D12: IC1.138 PL1.60 | length 10.1
  TopLayer w0.2: IC1.138 8.847,21.659 9.19,21.315 v1(9.264,21.315)
  BottomLayer w0.2: PL1.60@5.798,25.067 5.98,24.885 6.407,24.885 9.149,22.143 9.149,21.43 v1(9.264,21.315)
D13: IC1.142 PL1.61 | length 8.7
  TopLayer w0.2: IC1.142 6.68,19.059 8.115,20.495 8.115,20.893 v1(8.134,20.912)
  BottomLayer w0.2: PL1.61@5.798,23.797 6.52,23.797 8.134,22.183 v1(8.134,20.912)
D14: IC1.143 PL1.62 | length 9.5
  TopLayer w0.2: IC1.143 4.826,18.534 5.638,18.534 5.668,18.564 8.179,18.564 8.379,18.764 8.379,18.799 8.777,19.197 v1(8.777,19.359)
  BottomLayer w0.2: PL1.62@5.798,22.527 6.52,22.527 7.453,21.594 7.453,20.574 8.668,19.359 v1(8.777,19.359)
D15: IC1.144 PL1.63 | length 9
  TopLayer w0.2: IC1.144 8.446,17.759 8.772,18.085 v1(8.931,18.085)
  BottomLayer w0.2: PL1.63@5.798,21.257 5.798,21.25 6.124,20.924 6.365,20.924 8.048,19.241 8.048,18.968 v1(8.931,18.085)
D16: IC1.145 PL1.64 | length 10.2
  TopLayer w0.2: IC1.145 4.757,17.053 9.402,17.053 v1(9.458,16.997)
  BottomLayer w0.2: PL1.64@5.798,19.987 6.52,19.987 7.441,19.066 7.441,18.193 8.658,16.976 9.437,16.976 v1(9.458,16.997)
D17: IC1.146 PL1.65 | length 7.6
  TopLayer w0.2: IC1.146 4.811,16.349 8.316,16.349 v1(8.43,16.234)
  BottomLayer w0.2: PL1.65@5.798,18.717 6.011,18.504 6.407,18.504 8.316,16.595 8.316,16.349 v1(8.43,16.234)
D18: IC1.148 PL1.66 | length 9.1
  TopLayer w0.2: IC1.148 6.573,15.159 6.825,15.412 v1(9.306,15.412)
  BottomLayer w0.2: PL1.66@5.798,17.447 5.798,17.423 6.124,17.097 6.538,17.097 8.223,15.412 v1(9.306,15.412)
D19: IC1.150 PL1.67 | length 7.2
  TopLayer w0.2: IC1.150 7.791,13.859 8.216,14.284 v1(8.356,14.284)
  BottomLayer w0.2: PL1.67@5.798,16.177 6.463,16.177 v1(8.356,14.284)
D20: IC1.151 PL1.68 | length 8.9
  TopLayer w0.2: IC1.151 4.716,13.224 6.726,13.224 6.956,13.454 9.286,13.454 v1(9.306,13.434)
  BottomLayer w0.2: PL1.68@5.798,14.907 6.785,14.907 8.292,13.4 9.272,13.4 v1(9.306,13.434)
D21: IC1.152 PL1.69 | length 7.7
  TopLayer w0.2: IC1.152 4.712,12.548 7.455,12.548 7.691,12.784 v1(7.826,12.784)
  BottomLayer w0.2: PL1.69 3.952,13.634 7.454,13.634 7.711,13.377 7.711,12.899 v1(7.826,12.784)
D22: IC1.154 PL1.70 | length 8.5
  TopLayer w0.2: IC1.154 4.722,11.28 6.489,11.28 7.126,11.917 9.164,11.917 v1(9.222,11.974)
  BottomLayer w0.2: PL1.70@5.798,12.367 6.568,12.367 7.026,11.909 9.156,11.909 v1(9.222,11.974)
D23: IC1.155 PL1.71 | length 6.8
  TopLayer w0.2: IC1.155 4.716,10.624 7.103,10.624 7.634,11.154 7.834,11.154 7.839,11.149 8.361,11.149 v1(8.476,11.034)
  BottomLayer w0.2: PL1.71@5.798,11.097 5.861,11.034 v1(8.476,11.034)
D24: IC1.156 PL1.72 | length 7.1
  TopLayer w0.2: IC1.156 4.784,10.042 7.78,10.042 v1(7.789,10.05)
  BottomLayer w0.2: PL1.72 4.172,10.05 v1(7.789,10.05)
D25: IC1.157 PL1.73 | length 11.6
  TopLayer w0.2: IC1.157 8.485,9.309 v1(9.519,10.343)
  BottomLayer w0.2: PL1.73 4.299,8.907 8.083,8.907 v1(9.519,10.343)
D26: IC1.158 PL1.74 | length 10.8
  TopLayer w0.2: IC1.158 8.738,8.659 9.187,9.108 v1(9.279,9.108)
  BottomLayer w0.2: PL1.74 4.225,7.562 6.407,7.562 7.258,8.414 8.43,8.414 9.124,9.108 v1(9.279,9.108)
D27: IC1.1 PL1.77 | length 6.1
  TopLayer w0.2: IC1.1 7.176,6.99 v1(7.923,7.737)
  BottomLayer w0.2: v1(7.923,7.737) 8.005,7.655 8.43,7.655 9.642,6.443 9.642,5.983 PL1.77@9.791,5.834
D28: IC1.2 PL1.78 | length 6.7
  TopLayer w0.2: IC1.2 7.826,6.523 8.733,7.43 8.874,7.43 9.356,7.912 v1(9.382,7.912)
  BottomLayer w0.2: v1(9.382,7.912) 9.427,7.912 9.899,7.44 10.041,7.44 11.001,6.479 11.001,5.894 PL1.78@11.061,5.834
D29: IC1.3 PL1.79 | length 9.1
  TopLayer w0.2: IC1.3 8.476,6.134 9.383,7.041 9.458,7.041 10.479,8.062 v1(10.479,9.109)
  BottomLayer w0.2: v1(10.479,9.109) 10.5,9.088 10.5,8.409 12.331,6.577 PL1.79@12.331,5.834
D30: IC1.4 PL1.80 | length 8.1
  TopLayer w0.2: IC1.4 9.126,6.06 11.511,8.445 v1(11.511,8.492)
  BottomLayer w0.2: v1(11.511,8.492) 13.561,6.443 13.561,5.874 PL1.80@13.601,5.834
D31: IC1.5 PL1.81 | length 10.6
  TopLayer w0.2: IC1.5 9.776,6.134 11.464,7.822 11.789,7.822 12.376,8.41 12.376,9.332 v1(12.331,9.377)
  BottomLayer w0.2: v1(12.331,9.377) 12.376,9.332 12.376,8.414 13.856,6.934 14.171,6.934 14.662,6.443 14.662,6.043 PL1.81@14.871,5.834
DBE: IC1.30 PL1.83 | length 24.9
  TopLayer w0.2: IC1.30 26.026,8.447 26.301,8.722 v1(26.301,8.884)
  BottomLayer w0.2: PL1.83@17.411,5.834 17.35,5.895 17.35,7.014 16.78,7.584 13.815,7.584 13.081,8.319 13.081,9.102 13.712,9.734 15.851,9.734 16.672,8.913 19.418,8.913 19.652,9.147 24.211,9.147 24.474,8.884 v1(26.301,8.884)
GND: C1.1 C2.1 C3.1 C4.1 C5.1 C6.1 C7.1 C8.1 C9.1 C10.1 C11.1 C12.1 C13.1 IC1.15 IC1.24 IC1.39 IC1.53 IC1.69 IC1.80 IC1.86 IC1.90 IC1.103 IC1.116 IC1.129 IC1.140 IC1.149 IC1.160 IC2.7 IC2.10 IC2.11 IC2.12 PL1.33 PL1.54 PL1.75 X1.2 | length 14
  TopLayer w0.2: IC1.15 16.276,2.974 C4.1 ; C5.1 21.651,2.909 22.126,3.384 IC1.24 ; IC2.7 v1(37.142,42.785)
  BottomLayer w0.2: PL1.54@3.026,33.037 3.376,32.687 PL1.54 ; PL1.33 32.651,36.346 PL1.33@33.001,36.696
  BottomLayer w0.4: PL1.54@3.026,33.037 v1(3.026,34.418) ; v1(5.569,5.334) 6.901,5.334 7.251,4.984 PL1.75 ; PL1.33 32.651,35.556 32.901,35.306 v1(33.873,35.306)
  other v1: 7.21,0.956 1.016,1.069 14.205,1.069 19.301,1.069 21.701,1.069 25.851,1.069 34.051,4.215 36.201,4.875 1.016,5.983 16.141,6.837 23.851,7.074 28.365,7.108 20.207,8.107 38.862,8.896 11.552,10.818 17.551,13.968 0.913,14.431 10.156,14.474 21.014,14.709 38.862,14.907 16.591,16.684 1.016,17.484 18.681,18.184 38.862,18.634 9.801,20.082 1.049,20.437 15.227,20.791 1.049,23.434 38.906,25.334 11.29,26.005 38.906,28.384 24.726,28.427 16.102,29.651 18.632,29.651 1.016,30.147 30.352,30.827 27.426,31.116 35.088,33.995 38.719,37.477 1.016,38.154 17.411,38.909 27.226,38.909 9.791,39.399 26.451,43.142 40.013,44.546 33.332,44.646 8.113,44.959 15.691,48.154 33.355,48.154 39.601,48.154 1.049,48.2
M0: IC1.12 PL1.14 | length 27.5
  TopLayer w0.2: IC1.12 14.326,6.181 16.051,7.906 16.051,10.766 15.691,11.126 v1(15.691,12.134)
  BottomLayer w0.2: v1(15.691,12.134) 18.457,12.134 18.477,12.114 27.568,12.114 29.855,9.827 PL1.14@34.104,9.827
M1: IC1.16 PL1.13 | length 24.8
  TopLayer w0.2: IC1.16 16.926,8.4 16.892,8.434 16.892,10.5 17.024,10.632 v1(17.024,11.345)
  BottomLayer w0.2: v1(17.024,11.345) 17.069,11.3 27.426,11.3 30.169,8.557 PL1.13@34.104,8.557
NetIC2_2: IC2.2 IC2.6 | length 10
  TopLayer w0.2: IC2.2 30.792,43.195 31.332,43.735 35.282,43.735 35.872,43.145 IC2.6
NetIC2_3: IC2.3 X1.3 | length 15.4
  TopLayer w0.2: X1.3 23.451,44.842 25.917,42.376 29.553,42.376 30.157,41.772 30.157,39.953 30.274,39.836 31.72,39.836 31.837,39.953 31.837,40.713 IC2.3
NetIC2_5: IC2.5 R1.1 | length 3
  TopLayer w0.2: R1.1@34.277,38.529 34.439,38.529 R1.1@34.602,38.529 ; R1.1 R1.1@34.602,38.529 ; IC2.5 R1.1@34.602,38.529
PHI2: IC1.23 PL1.1 | length 4.3
  TopLayer w0.2: IC1.23 21.492,4.9 21.492,6.905 v1(21.509,6.921)
  BottomLayer w0.2: PL1.1@19.951,5.834 20.207,6.09 20.207,6.443 20.698,6.934 21.496,6.934 v1(21.509,6.921)
RST: IC2.13 PL1.9 | length 62.5
  TopLayer w0.2: v1(30.792,44.835) IC2.13
  BottomLayer w0.2: PL1.9@30.437,5.508 30.437,1.562 30.56,1.44 34.086,1.44 39.601,6.955 39.601,42.878 38.503,43.976 31.651,43.976 v1(30.792,44.835)
SEQ: IC1.20 PL1.15 | length 24.4
  TopLayer w0.2: v1(18.754,12.784) 19.513,12.024 19.513,4.896 IC1.20
  BottomLayer w0.2: v1(18.754,12.784) 23.311,12.784 23.511,12.984 27.559,12.984 29.446,11.097 PL1.15@34.104,11.097
TRANS: IC1.9 PL1.10 | length 28.4
  TopLayer w0.2: IC1.9 12.376,6.251 12.807,6.682 14.205,6.682 15.564,8.042 15.564,10.143 15.261,10.447 v1(15.261,10.609)
  BottomLayer w0.2: v1(15.261,10.609) 15.327,10.675 27.191,10.675 31.381,6.485 PL1.10
VCC: C1.2 C2.2 C3.2 C4.2 C5.2 C6.2 C7.2 C8.2 C9.2 C10.2 C11.2 C12.2 C13.2 IC1.13 IC1.25 IC1.41 IC1.55 IC1.78 IC1.87 IC1.102 IC1.122 IC1.139 IC1.141 IC1.159 IC2.1 IC2.4 IC2.14 PL1.11 PL1.32 PL1.55 PL1.82 X1.4 | length 71.6
  TopLayer w0.2: IC1.159@4.676,7.984 IC1.159 ; IC1.102 IC1.102@18.88,35.188 ; IC1.87 IC1.87@28.632,35.19 ; IC2.4 v1(33.332,42.572) ; IC1.55 IC1.55@35.038,16.421
  TopLayer w0.3: v1(3.026,47.691) 3.056,47.661 4.401,47.661 4.432,47.691 4.544,47.579 X1.4
  TopLayer w0.4: v1(1.016,7.984) 1.028,7.996 4.663,7.996 IC1.159@4.676,7.984 ; v1(1.016,21.984) 1.049,22.017 2.645,22.017 3.598,21.064 3.754,21.064 3.784,21.034 4.676,21.034 IC1.139 ; v1(1.016,31.4) 1.552,31.936 2.122,31.936 C11.2@2.244,32.059 ; v1(1.049,18.884) 1.918,18.884 C2.2@1.984,18.95 ; C11.2@2.194,32.059 C11.2@2.244,32.059 ; C2.2 2.486,19.084 2.679,19.084 3.279,19.684 4.676,19.684 IC1.141 ; C11.2 C11.2@2.244,32.059 ; IC1.122 C11.2@2.244,32.059 ; C4.2@14.976,2.824 IC1.13 ; C4.2 14.991,1.98 15.825,1.145 16.064,1.145 v1(16.141,1.069) ; IC1.102@18.88,35.188 18.901,35.209 C10.2@18.901,37.292 ; C10.2@18.926,37.292 v1(18.926,38.909) ; IC1.25 22.776,3.309 23.113,2.971 23.051,2.909 C5.2 v1(23.051,1.069) ; v1(27.974,40.938) IC2.1 ; v1(28.618,38.909) 28.636,38.891 28.636,37.6 28.632,37.596 IC1.87@28.632,35.19 ; IC1.41 36.528,7.359 C6.2@37.339,7.359 ; IC1.78 C8.2@37.03,31.409 ; IC1.55@35.038,16.434 35.088,16.484 37.289,16.484 37.302,16.471 38.824,16.471 v1(38.862,16.434) ; v1(36.788,6.251) 36.788,6.359 37.209,6.78 37.209,7.309 37.389,7.489 C6.2 ; C8.2 38.158,31.516 38.646,32.004 38.646,32.629 v1(38.723,32.705)
  TopLayer w0.5: v1(26.026,46.406) 27.351,46.406 C13.2@27.437,46.493 ; C13.2 29.478,46.406 IC2.14
  BottomLayer w0.4: v1(16.141,1.069) PL1.82
  BottomLayer w0.6: v1(1.016,31.4) 1.024,31.409 5.769,31.409 PL1.55@5.777,31.4 ; PL1.11@32.659,5.811 32.659,3.001 32.801,2.859 v1(34.126,2.859) ; PL1.32@34.844,32.705 34.854,32.696 38.714,32.696 v1(38.723,32.705)
pads on no net: IC1.8 IC1.10 IC1.11 IC1.14 IC1.19 IC1.26 IC1.27 IC1.33 IC1.34 IC1.35 IC1.48 IC1.54 IC1.67 IC1.70 IC1.71 IC1.72 IC1.73 IC1.74 IC1.75 IC1.76 IC1.77 IC1.79 IC1.81 IC1.82 IC1.83 IC1.84 IC1.85 IC1.88 IC1.89 IC1.91 IC1.92 IC1.93 IC1.94 IC1.95 IC1.96 IC1.97 IC1.98 IC1.99 IC1.100 IC1.101 IC1.104 IC1.105 IC1.106 IC1.107 IC1.108 IC1.109 IC1.110 IC1.111 IC1.112 IC1.113 IC1.114 IC1.115 IC1.117 IC1.118 IC1.119 IC1.120 IC1.121 IC1.128 IC1.134 IC1.147 IC1.153 IC2.9 PL1.2 PL1.4 PL1.12 PL1.76 X1.1

## Polygon pours and split planes (outlines as drawn)
GND on GND "GND_L02_P000" (solid, pour order 0): 0,0 0,49.234 40.836,49.234 40.836,0
VCC on VCC "VCC_L03_P001" (solid, pour order 1): 0,0 0,49.234 40.836,49.234 40.836,0
GND on TopLayer "GND_L01_P002" (solid, remove dead copper, pour order 2): 0,49.234 40.836,49.234 40.836,0 0,0
GND on BottomLayer "GND_L04_P003" (solid, remove dead copper, pour order 3): 0,0 0,49.234 40.836,49.234 40.836,0

## Keep-outs
KeepOutLayer:
  lines w0.203: 0,0 0,49.234 40.836,49.234 40.836,6.643 34.193,0 0,0

## Silkscreen, mask and mechanical layers (free items; w line width, h text height)
TopOverlay:
  text "ARM3" at 4.144,34.931 h2.5 r90
  text "(C) IanJ, 2025" at 24.114,2.512 h0.75
BottomOverlay:
  region: 32.28,9.559 32.277,9.555 32.277,7.634 30.365,7.634 30.351,7.648
Mechanical4:
  lines w0.2: 0,0 34.193,0 40.836,6.643 40.836,49.234 0,49.234 0,0